# Altium PCB Switch for MMU PCB.pcbdoc
Units mm, origin at the board's own origin, x right, y up, seen from the top; angles counter-clockwise.
Board outline 112.83 x 40.65 mm, 2 copper layers (Top Layer, Bottom Layer); 5 components, 6 nets, 23 pads, 0 vias.
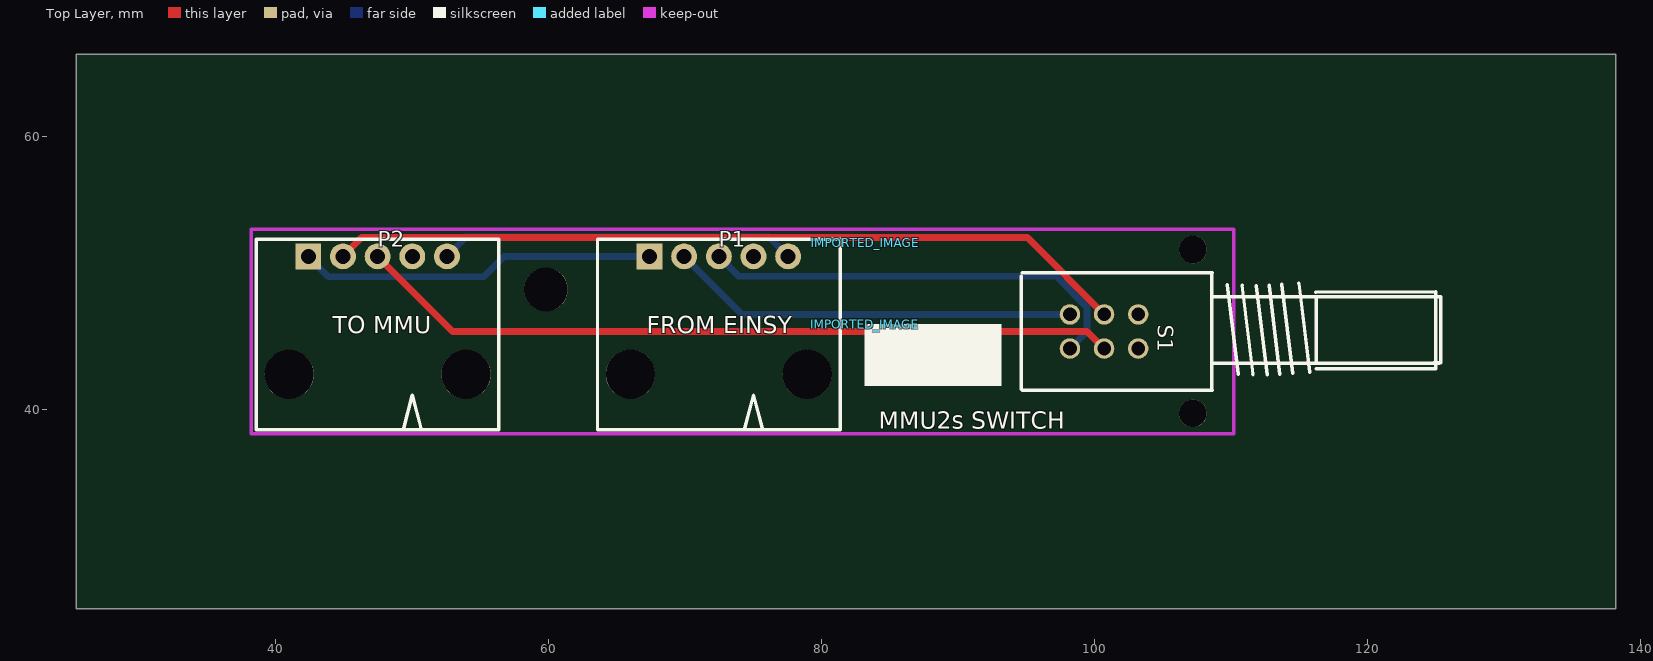
[diagram p0: Top Layer view]
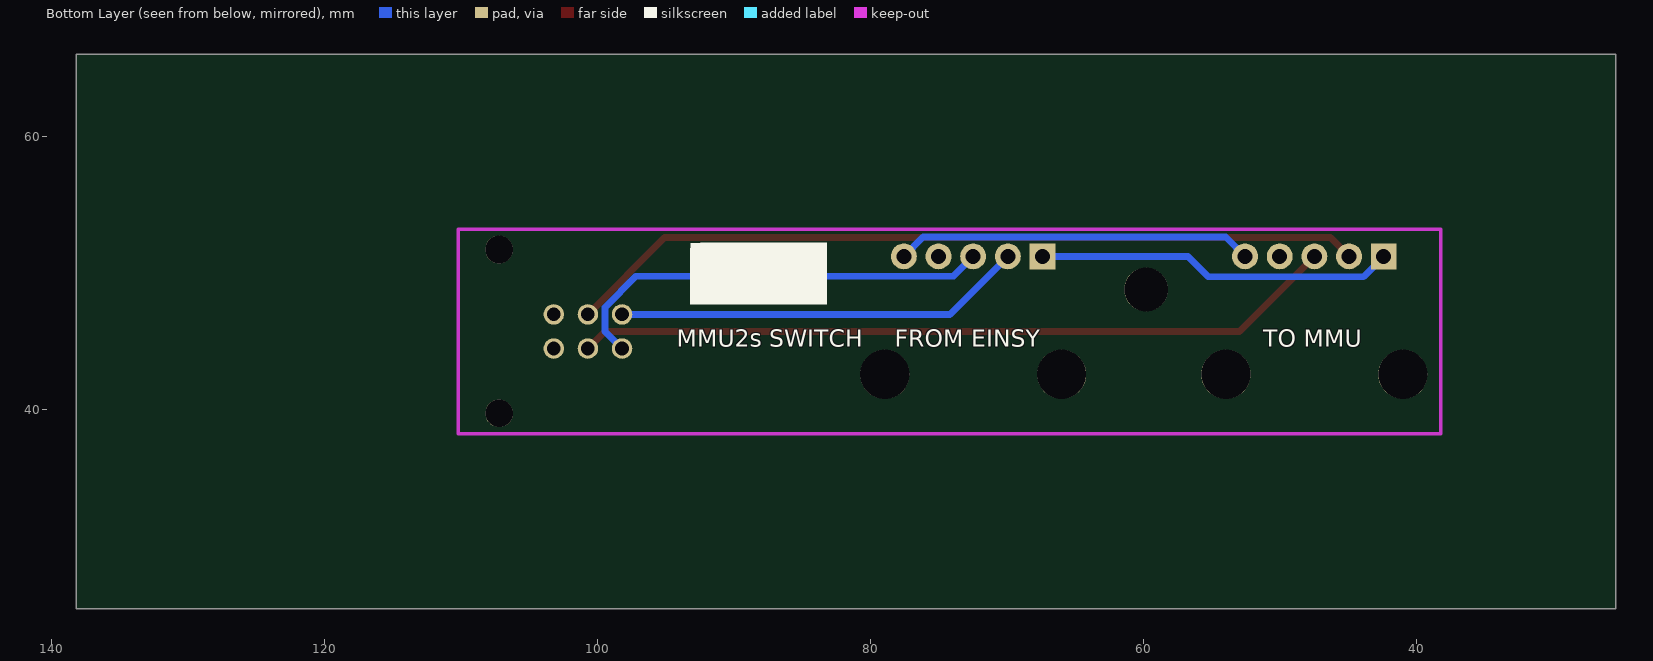
[diagram p1: Bottom Layer view, seen from below]

## Layer stack, top to bottom
Top Layer: signal copper (thickness not stored)
Dielectric: dielectric 0.32, FR-4, Dk 4.8
Bottom Layer: signal copper (thickness not stored)

## Board outline
138.231,25.4 25.4,25.4 25.4,66.054 138.231,66.054

## Components (designator, comment, footprint, x,y, rotation, side; value= is the part's Value field where it differs from the comment)
IMPORTED_IMAGE "IMPORTED_IMAGE" IMPORTED_IMAGE 83.227,52.227 r0 top
IMPORTED_IMAGE "IMPORTED_IMAGE" IMPORTED_IMAGE 83.192,46.265 r0 top
P1 "MOLEX 70543-0004" CONN-TH_5P-P2.54_5-103673-4 71.227,51.227 r0 top
P2 "MOLEX 70543-0004" CONN-TH_5P-P2.54_5-103673-4 46.227,51.227 r0 top
S1 "SWITCH-SPSTPTH2" "E-SWITCH PBH2UEESNP" 98.226,45.726 r270 top

## Footprints (in the part's own frame and the unit in brackets; to place one, negate y for a bottom-side part, rotate by r counter-clockwise, add the part's x,y. Pads: shape width x height; smd on the part's side, far side on the other; paste and mask are expansions set on the pad)
CONN-TH_5P-P2.54_5-103673-4 [mm]
  rect 1.9x1.9 hole 1.1: 1(-3.81,0)
  round 1.9 hole 1.1: 2(-1.27,0) 3(1.27,0) 4(3.81,0) 5(6.35,0)
  round 3.6 hole 3.6 unplated: ""(-5.21,-8.64) ""(7.75,-8.64)
  silkscreen extent -7.62,-12.7 10.16,1.27
"E-SWITCH PBH2UEESNP" [mm]
  round 1.5 hole 1: 1(-1.25,0) 2(-1.25,2.499) 3(-1.25,4.999) 4(1.25,0) 5(1.25,2.499) 6(1.25,4.999)
  silkscreen extent -4.32,-3.56 4.32,27.18
IMPORTED_IMAGE [mm]

## Free pads (board coordinates)
  round 3.2 hole 3.2 unplated: ""(59.826,48.798)
  round 2.032 hole 2.032 unplated: ""(107.227,39.727) ""(107.227,51.727)

## Nets (pads, with @x,y where several pads share a name; then routed paths per layer and width w, separated by ;. In a path a pad name is that pad's centre, name@x,y a point inside that pad or via, vN(x,y) a via of type N, cw(c..) or ccw(c..) an arc to the next point about the centre after c; other vN are vias at no path point)
P1_1: P1.1 P2.1 | length 26.2
  Bottom Layer w0.5: P2.1@42.417,51.228 43.911,49.732 55.252,49.732 56.746,51.228 P1.1@67.416,51.228
P1_5: P1.5 P2.5 | length 26.2
  Bottom Layer w0.5: P2.5@52.577,51.228 53.992,52.643 76.161,52.643 P1.5@77.576,51.228
S1_1: P1.2 S1.1 | length 30
  Bottom Layer w0.5: P1.2@69.956,51.228 74.208,46.976 S1.1
S1_2: P2.2 S1.2 | length 58.7
  Top Layer w0.5: P2.2@44.957,51.228 46.329,52.6 95.102,52.6 S1.2
S1_4: P1.3 S1.4 | length 32.1
  Bottom Layer w0.5: P1.3@72.496,51.228 73.947,49.778 97.195,49.778 99.476,47.497 99.476,45.726 S1.4
S1_5: P2.3 S1.5 | length 56
  Top Layer w0.5: P2.3@47.497,51.228 52.997,45.726 99.476,45.726 S1.5
pads on no net: P1. P1.4 P2. P2.4 S1.3 S1.6

## Silkscreen, mask and mechanical layers (free items; w line width, h text height)
Top Overlay:
  text "TO MMU" at 44.227,45.602 h1.25
  text "FROM EINSY" at 67.227,45.602 h1.25
  text "MMU2s SWITCH" at 84.227,38.602 h1.25
Bottom Overlay:
  text "TO MMU" at 51.227,44.602 h1.25
  text "FROM EINSY" at 78.227,44.602 h1.25
  text "MMU2s SWITCH" at 94.227,44.602 h1.25
Document:
  lines w0.003: 81.79,45.702 81.841,45.752